# Altium PCB PCB1.PcbDoc
Units mil, origin at the board's own origin, x right, y up, seen from the top; angles counter-clockwise.
Board outline 6369.4 x 4949.4 mil, 2 copper layers (Top Layer, Bottom Layer); 109 components, 62 nets, 359 pads, 58 vias.
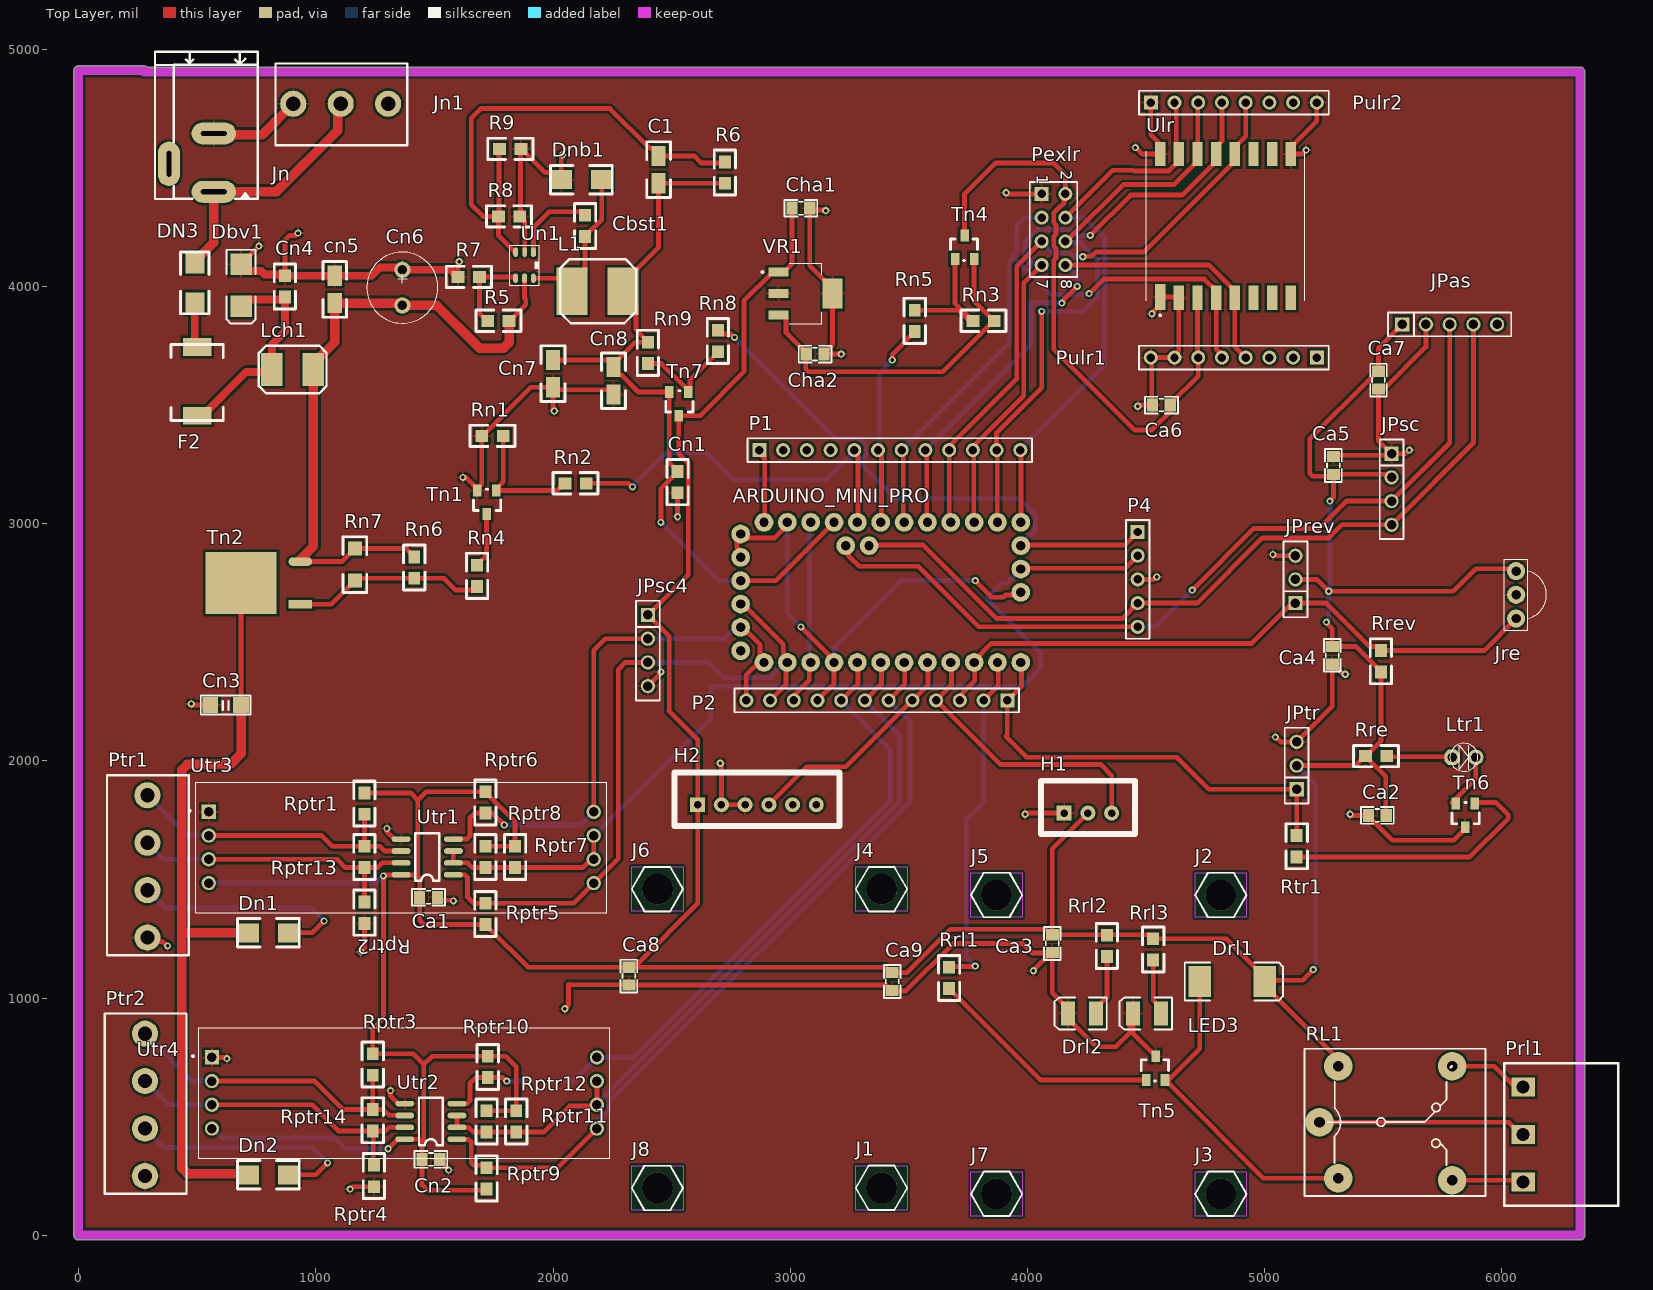
[diagram p0: Top Layer view]
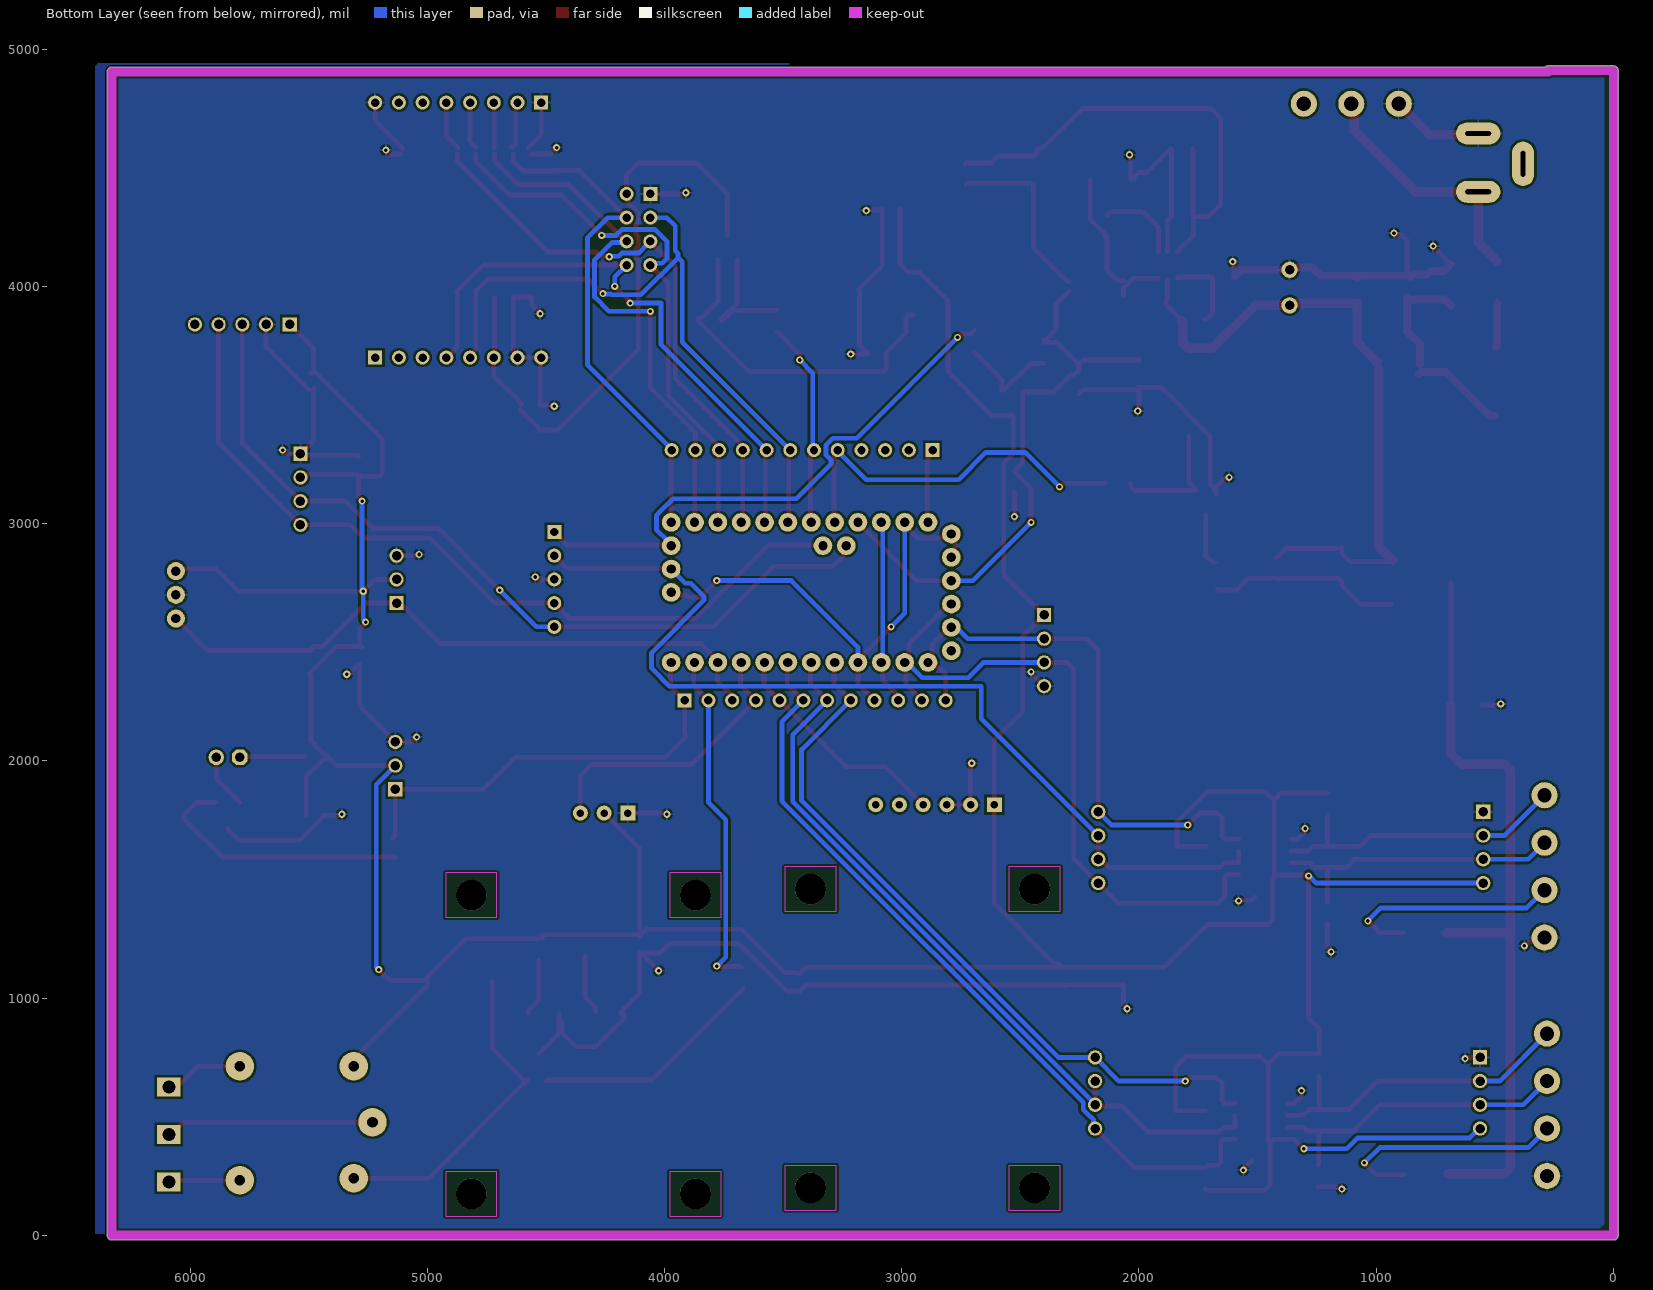
[diagram p1: Bottom Layer view, seen from below]

## Layer stack, top to bottom
Top Solder: solder mask 0.4, Solder Resist, Dk 3.5
Top Layer: signal copper 1.4
Dielectric 1: dielectric 12.6, FR-4, Dk 4.8
Bottom Layer: signal copper 1.4
Bottom Solder: solder mask 0.4, Solder Resist, Dk 3.5

## Board outline
0,-19.7 cw(c0,0) -19.7,0 -19.7,4910 cw(c0,4910) 0,4929.7 275,4929.7 cw(c275,4910) 288.11,4924.7 6330,4924.7 cw(c6330,4905) 6349.7,4905 6349.7,0 cw(c6330,0) 6330,-19.7

## Design rules (kind name [scope] priority, off if disabled: settings)
Clearance Clearance_1 [All] p1: gap=10 ignorepadtopadclearanceinfootprint=FALSE except(0: THPad-Fill THPad-Poly THPad-Region Fill-Hole Poly-Hole Region-Hole)
Clearance Clearance_GND [InNet('GND')] p2: gap=13 ignorepadtopadclearanceinfootprint=FALSE
HoleSize [All] p1: absolutevalues=TRUE maxlimit=200 minlimit=1 maxpercent=80.000 minpercent=20.000
MinimumSolderMaskSliver [All] p1: minsoldermaskwidth=8
PolygonConnect [All] p1: connectstyle=Relief reliefconductorwidth=10 reliefentries=4 polygonreliefangle="90 Angle" airgapwidth=10
RoutingVias [All] p1: holewidth=15 width=30 viastyle="Through Hole" minholewidth=10 minwidth=20 maxholewidth=48 maxwidth=150
SilkToSilkClearance [All] p1: silktosilkclearance=0
SilkToSolderMaskClearance [IsPad] p1: minsilkscreentomaskgap=0 clearancetoexposedcopper=TRUE
SolderMaskExpansion SolderMaskExpansion_1 [All] p1: expansion=4 istentingtop=FALSE
SolderMaskExpansion [IsVia] p2: expansion=4 istentingtop=FALSE
Width [All] p1: maxlimit=40 minlimit=10 preferedwidth=20
26 further rules are at their usual default settings.

## Components (designator, comment, footprint, x,y, rotation, side; value= is the part's Value field where it differs from the comment)
ARDUINO_MINI_PRO "ARDUINO_MINI_PRO" ARDUINO_MINI_PRO 2948.5,2513.43 r90 top
C1 "100pF" 1206e 2445,4435 r90 top
Ca1 "CAP" "Cap 0805" 1475,1425 r0 top
Ca2 "CAP" "Cap 0805" 5475,1770 r180 top
Ca3 "CAP" "Cap 0805" 4105,1230 r270 top
Ca4 "CAP" "Cap 0805" 5285,2445 r270 top
Ca5 "CAP" "Cap 0805" 5290,3245 r90 top
Ca6 "CAP" "Cap 0805" 4565,3500 r180 top
Ca7 "CAP" "Cap 0805" 5480,3605 r270 top
Ca8 "CAP" "Cap 0805" 2320.13,1092.77 r270 top
Ca9 "CAP" "Cap 0805" 3430,1070 r270 top
Cbst1 "Cap" 0805c 2135,4300 r270 top value=100pF
Cha1 "0.47uF" "Cap 0805" 3045,4330 r0 top
Cha2 "0.33uF" "Cap 0805" 3105,3715 r0 top
Cn1 "104" 0805c 2525,3130 r90 top
Cn2 "CAP" "Cap 0805" 1485,320 r0 top
Cn3 "CAP" "Cap 1206" 620,2235 r180 top
Cn4 "104" 0805c 870,3955 r90 top value=100pF
cn5 "CAP" 1206e 1080,3930 r90 top
Cn6 "CAPACITOR" cc15r15 1365,3920 r90 top
Cn7 "CAP" 1206e 2000,3690 r270 top
Cn8 "CAP" 1206e 2255,3660 r270 top
Dbv1 "DIODE" smb 685,4005 r270 top
Dn1 "Diode" Sma 715,1275 r0 top
Dn2 "Diode" Sma 715,255 r0 top
DN3 "DIODE" sma 490,4100 r270 top
Dnb1 "Diode" Sma 2035,4450 r0 top
Drl1 "Diode" SMC 4863.19,1070 r0 top
Drl2 "LED3" 3.5X2.8X1.9 4230,935 r180 top
F2 "FUSE1" FuseSMD050 500,3745 r270 top
H1 "Header 3P 2.54 Duc Thang" XH2.54M-3 4155,1780 r0 top
H2 "Header 6P 2.54 Duc Thang" XH2.54M-6 2610,1815 r0 top
J1 "SO-3015-03-03-02-N" SAMTEC_SO-3015-03-03-02-N#1 3385,200 r0 top
J2 "SO-3015-03-03-02-N" SAMTEC_SO-3015-03-03-02-N#1 4815,1434.37 r0 top locked
J3 "SO-3015-03-03-02-N" SAMTEC_SO-3015-03-03-02-N#2 4815,174.53 r0 top locked
J4 "SO-3015-03-03-02-N" SAMTEC_SO-3015-03-03-02-N#1 3385,1459.37 r0 top
J5 "SO-3015-03-03-02-N" SAMTEC_SO-3015-03-03-02-N#1 3870.12,1434.37 r0 top locked
J6 "SO-3015-03-03-02-N" SAMTEC_SO-3015-03-03-02-N#1 2440.12,1459.37 r0 top
J7 "SO-3015-03-03-02-N" SAMTEC_SO-3015-03-03-02-N#1 3870.12,174.53 r0 top locked
J8 "SO-3015-03-03-02-N" SAMTEC_SO-3015-03-03-02-N#3 2440.12,199.53 r0 top
Jn "DC -JACK" CON3_129_PJ-002A_TH_RA 570,4399 r270 top
Jn1 "CON3" giacdung3 1105,4770 r0 top
JPas "JP 1x5 2.54" "JP 1x5 CT" 5580,3840 r0 top
JPrev "JP 1x3 2.54" "JP 1x3 CT" 5130,2665 r90 top
JPsc "JP 1x4 2.54" "JP 1x4 CT" 5535,3295 r270 top
JPsc4 "JP 1x4 2.54" "JP 1x4 CT" 2400,2615 r270 top
JPtr "JP 1x3 2.54" "JP 1x3 CT" 5135,1880 r90 top
Jre "TSOP1838" TSOP1838 6060,2700 r90 top
L1 "Inductor" IND_SPR06xe 2080,3980 r0 top value=10mH
Lch1 "INDUCTOR" IND_SPR05x 815,3650 r0 top
LED3 "LED3" 3.5X2.8X1.9 4505,935 r180 top
Ltr1 "LED 3mm" LED-3MM-RED 5790,2015 r0 top
P1 "Header 12" HDR1X12 2870,3310 r0 top
P2 "Header 12" HDR1X12 3915,2255 r180 top
P4 "Header 5" HDR1X5 4465,2965 r270 top
Pexlr "nRF24L01" HDR2X4 4060,4390 r270 top
Prl1 "CON 3 EDG5.08" "CON 3 3EDG5.08" 6090,625 r270 top
Ptr1 "Header 4" giacdung4 290,1455 r90 top
Ptr2 "Header 4" giacdung4 280,450 r90 top
Pulr1 "Header 8" HDR1X8 5220,3700 r180 top
Pulr2 "Header 8" HDR1X8 4520,4775 r0 top
R5 "Res1" 0805c 1815,3855 r180 top value=1K
R6 "Res1" 0805c 2725,4435 r90 top value=1K
R7 "Res1" 0805c 1600,4040 r0 top value=1K
R8 "Res1" 0805c 1860,4295 r180 top value=1K
R9 "Res1" 0805c 1865,4580 r180 top value=1K
RL1 "Relay" "Relay 5 Chan SRD" 5231.26,476.22 r0 top
Rn1 "1k" 0805c 1790,3370 r180 top
Rn2 "10k" 0805c 2140,3170 r180 top
Rn3 "1k" 0805c 3770,3855 r0 top
Rn4 "10k" 0805c 1680,2825 r270 top
Rn5 "10k" 0805c 3525,3810 r90 top
Rn6 "10k" 0805c 1415,2860 r270 top
Rn7 "z10V" 1206 1165,2895 r270 top
Rn8 "10k" 0805c 2695,3815 r270 top
Rn9 "1k" 0805c 2400,3675 r90 top
Rptr1 "Res1" 0805c 1205,1865 r270 top value=20K
Rptr2 "Res1" 0805c 1205,1315 r90 top value=20K
Rptr3 "Res1" 0805c 1240,765 r270 top value=20K
Rptr4 "Res1" 0805c 1245,205 r90 top value=20K
Rptr5 "Res1" 0805c 1715,1310 r90 top value=10K
Rptr6 "Res1" 0805c 1715,1870 r270 top value=10K
Rptr7 "Res1" 0805c 1840,1640 r270 top value=10K
Rptr8 "Res1" 0805c 1715,1640 r270 top value=10K
Rptr9 "Res1" 0805c 1720,195 r90 top value=10K
Rptr10 "Res1" 0805c 1725,755 r270 top value=10K
Rptr11 "Res1" 0805c 1845,525 r270 top value=10K
Rptr12 "Res1" 0805c 1720,525 r270 top value=10K
Rptr13 "Res1" 0805c 1205,1550 r90 top value=120
Rptr14 "Res1" 0805c 1240,440 r90 top value=120
Rre "Res1" 0805c 5515,2020 r180 top value=1K
Rrev "Res1" 0805c 5490,2465 r270 top value=1K
Rrl1 "Res1" 0805c 3670,1130 r270 top value=1K
Rrl2 "Res1" 0805c 4335,1175 r90 top value=1K
Rrl3 "Res1" 0805c 4530,1160 r90 top value=1K
Rtr1 "10k" 0805c 5135,1595 r90 top
Tn1 "c1815" sot23-3 1760,3140 r180 top
Tn2 "CON3" dpak 935,2660 r90 top
Tn4 "ao3401" sot23-3 3695,4115 r0 top
Tn5 "ao3401" sot23-3 4500,655 r0 top
Tn6 "ao3401" sot23-3 5885,1820 r180 top
Tn7 "ao3401" sot23-3 2570,3555 r180 top
Ulr "RA-02_LORA" MODULE_RA-02_LORA 4835,4255 r90 top
Un1 "AOZ1282CI" Sot23-6 1885,4085 r270 top
Utr1 "MAX485" so-8 1580,1520 r180 top
Utr2 "MAX485" so-8 1595,405 r180 top
Utr3 "MAX485_MODULE_5V_LOGIC_TLL_TO_RS-485_CONVERTER" MODULE_MAX485_MODULE_5V_LOGIC_TLL_TO_RS-485_CONVERTER 1360,1635 r0 top
Utr4 "MAX485_MODULE_5V_LOGIC_TLL_TO_RS-485_CONVERTER" MODULE_MAX485_MODULE_5V_LOGIC_TLL_TO_RS-485_CONVERTER 1373.19,600 r0 top
VR1 "LM3940IMP-3.3/NOPB" VREG_LM3940IMP-3.3/NOPB 3064.17,3970 r0 top

## Footprints (in the part's own frame and the unit in brackets; to place one, negate y for a bottom-side part, rotate by r counter-clockwise, add the part's x,y. Pads: shape width x height; smd on the part's side, far side on the other; paste and mask are expansions set on the pad)
3.5X2.8X1.9 [mm] "SM LED; 2 C-Bend Leads; Body 3.5 x 2.8 x 1.9 mm, inc leads (LxWxH typ)"
  rect 1.5x2.6 smd: 1(-1.5,0) 2(1.5,0)
  silkscreen extent -2.65,-1.7 2.95,1.7
0805c [mil]
  rect 54x50 smd: 1(0,0) 2(90,0)
  silkscreen extent -50,-45 140,45
1206 [mil]
  rect 60x60 smd: 1(0,0) 2(135,0)
  silkscreen extent -50,-50 185,50
1206e [mil]
  rect 85x60 smd: 1(0,0) 2(115,0)
  silkscreen extent -60,-50 175,50
ARDUINO_MINI_PRO [mm]
  round 2 hole 1: 2(-2.5,-8.5) 3(-2.5,-11) 4(-2.5,-13.5) 5(-2.5,-16) 6(-2.5,-18.5) 7(-2.5,-21) 8(-2.5,-23.5) 9(-2.5,-26) 10(12.5,-26) 11(12.5,-23.5) 12(12.5,-21) 13(12.5,-18.5) A0(12.5,-16) A1(12.5,-13.5) A2(12.5,-11) A3(12.5,-8.5) A4(10,-9.75) A5(10,-7.25) A6(7.5,-26) A7(10,-26) DTR(-1.25,4) GND(-2.5,-6) GND(5,-26) GND(8.75,4) GND(11.25,4) GND(12.5,-1) RAW(12.5,1.5) RST(-2.5,-3.5) RST(12.5,-3.5) RX(-2.5,-1) RX(3.75,4) TX(-2.5,1.5) TX(1.25,4) VCC(6.25,4) VCC(12.5,-6)
"Cap 0805" [mm] "Compoment SMD 80x50mil"
  rect 1.2x1.4 smd: 1(-0.946,-0.003) 2(0.954,-0.003)
  silkscreen extent -1.75,-0.89 1.75,0.89, body extent -0.97,-0.61 1.03,0.64, height 1.23
"Cap 1206" [mm]
  rect 1.7x1.7 smd: 1(-1.65,0) 2(1.65,0)
  silkscreen extent -2.67,-1.02 2.67,1.02, body extent -1.6,-0.8 1.6,0.8, height 1.02
cc15r15 [mil]
  round 69 hole 40: 1(0,0) 2(150,0)
  silkscreen extent -75,-150 225,150
CON3_129_PJ-002A_TH_RA [mm] "DC JACK"
  oval 2.35x4.75 hole 0.5 slot 2.75 at 90 deg: 1(0,0) 2(-6.248,0)
  oval 4.75x2.35 hole 2.75 slot 0.5 at 90 deg: 3(-2.997,-4.801)
  silkscreen extent -14.98,-6.3 0.81,4.7, body extent -13.92,-4.93 0.48,4.47, height 11.01
"CON 3 3EDG5.08" [mm]
  rect 2x2.5 hole 1.4: 1(0,0) 2(5.08,0) 3(10.173,0)
  silkscreen extent -2.54,-2.03 12.71,10.16, body extent -2.5,-1.75 12.67,10.25, height 3.15
dpak [mil]
  rect 36x100 smd: 1(0,0)
  rect 260x300 smd: 2(90,250)
  oval 36x100 smd: 3(180,0)
FuseSMD050 [mil]
  rect 75x120 smd: 1(0,0) 2(290,0)
  silkscreen extent -10,-110 310,110
giacdung3 [mil]
  round 110 hole 60: 1(-200,0) 2(0,0) 3(200,0)
  silkscreen extent -275,-175 280,170
giacdung4 [mil]
  round 110 hole 60: 1(-200,0) 2(0,0) 3(200,0) 4(400,0)
  silkscreen extent -275,-175 485,170
HDR1X5 [mm] "Connector; Header; 5 Position"
  rect 1.5x1.5 hole 0.9: 1(0,0)
  round 1.5 hole 0.9: 2(2.54,0) 3(5.08,0) 4(7.62,0) 5(10.16,0)
  silkscreen extent -1.27,-1.27 11.43,1.27
HDR1X8 [mm] "Connector; Header; 8 Position"
  rect 1.5x1.5 hole 0.9: 1(0,0)
  round 1.5 hole 0.9: 2(2.54,0) 3(5.08,0) 4(7.62,0) 5(10.16,0) 6(12.7,0) 7(15.24,0) 8(17.78,0)
  silkscreen extent -1.27,-1.27 19.05,1.27
HDR1X12 [mm] "Connector; Header; 12 Position"
  rect 1.5x1.5 hole 0.9: 1(0,0)
  round 1.5 hole 0.9: 2(2.54,0) 3(5.08,0) 4(7.62,0) 5(10.16,0) 6(12.7,0) 7(15.24,0) 8(17.78,0) 9(20.32,0) 10(22.86,0) 11(25.4,0) 12(27.94,0)
  silkscreen extent -1.27,-1.27 29.21,1.27
HDR2X4 [mm] "Connector; Header; 4x2 Position"
  rect 1.5x1.5 hole 0.9: 1(0,0)
  round 1.5 hole 0.9: 2(0,2.54) 3(2.54,0) 4(2.54,2.54) 5(5.08,0) 6(5.08,2.54) 7(7.62,0) 8(7.62,2.54)
  silkscreen extent -1.27,-1.27 8.89,3.81
IND_SPR05x [mil]
  rect 90x140 smd: 1(0,0) 2(175,0)
  silkscreen extent -55,-100 230,100
IND_SPR06xe [mil]
  rect 130x200 smd: 1(0,0) 2(215,0)
  silkscreen extent -50,-135 270,135
"JP 1x3 CT" [mm]
  rect 1.52x1.52 hole 1.02: 1(0,0)
  round 1.52 hole 1.02: 2(2.54,0) 3(5.08,0)
  silkscreen extent -1.52,-1.27 6.6,1.27, body extent -1.52,-1.25 6.6,1.25, height 8.51
"JP 1x4 CT" [mm]
  rect 1.52x1.52 hole 1.02: 1(0,0)
  round 1.52 hole 1.02: 2(2.54,0) 3(5.08,0) 4(7.62,0)
  silkscreen extent -1.52,-1.27 9.14,1.27, body extent -1.52,-1.25 9.14,1.25, height 8.51
"JP 1x5 CT" [mm]
  rect 1.52x1.52 hole 1.02: 1(0,0)
  round 1.52 hole 1.02: 2(2.54,0) 3(5.08,0) 4(7.62,0) 5(10.16,0)
  silkscreen extent -1.52,-1.27 11.68,1.27, body extent -1.52,-1.25 11.68,1.25, height 8.51
LED-3MM-RED [mil]
  oct 65x65 hole 40: 1(0,0)
  round 65 hole 40: 2(100,0)
  silkscreen extent -9,-59 109,59, body extent -27,-77 117,80, height 181
MODULE_MAX485_MODULE_5V_LOGIC_TLL_TO_RS-485_CONVERTER [mm]
  rect 1.53x1.53 hole 1.02: 1(-20.6,3.81)
  round 1.53 hole 1.02: 2(-20.6,1.27) 3(-20.6,-1.27) 4(-20.6,-3.81) 5(20.62,-3.81) 6(20.62,-1.27) 7(20.62,1.27) 8(20.62,3.81)
  silkscreen extent -22.73,-7 22,7, body extent -22,-7.01 22,6.98, height 13.54
MODULE_RA-02_LORA [mm]
  rect 2.8x1.1 smd: 1(-7.6,7)
  rect 2.6x1.1 smd: 2(-7.7,5) 3(-7.7,3) 4(-7.7,1) 5(-7.7,-1) 6(-7.7,-3) 7(-7.7,-5) 8(-7.7,-7) 9(7.7,-7) 10(7.7,-5) 11(7.7,-3) 12(7.7,-1) 13(7.7,1) 14(7.7,3) 15(7.7,5) 16(7.7,7)
  silkscreen extent -9.68,-8.5 8,8.5
"Relay 5 Chan SRD" [mil] "Relay SPDT, 5 pin, 10A,W 650mil, L 800mil, H 800mil"
  round 120 hole 45: 1(0,0) 2(559.06,236.22) 3(559.06,-243.78) 4(78.74,-236.22) 5(78.74,236.22)
  silkscreen extent -63,-311 700,310, body extent -55,-306 697,304, height 602
SAMTEC_SO-3015-03-03-02-N#1 [mm]
  round 3.3 hole 3.3 unplated mask+0: ""(0,0)
  Keep-Out Layer region: 2.75,-2.38 -2.75,-2.38 -2.75,2.38 2.75,2.38
  Keep-Out Layer region: 2.75,-2.38 -2.75,-2.38 -2.75,2.38 2.75,2.38
  silkscreen extent -2.75,-2.38 2.75,2.38
SAMTEC_SO-3015-03-03-02-N#2 [mm]
  round 3.3 hole 3.3 unplated: ""(0,0)
  Keep-Out Layer region: 2.75,-2.38 -2.75,-2.38 -2.75,2.38 2.75,2.38
  Keep-Out Layer region: 2.75,-2.38 -2.75,-2.38 -2.75,2.38 2.75,2.38
  silkscreen extent -2.75,-2.38 2.75,2.38
SAMTEC_SO-3015-03-03-02-N#3 [mm]
  round 3.3 hole 3.3 unplated mask+0: 3(0,0)
  Keep-Out Layer region: 2.75,-2.38 -2.75,-2.38 -2.75,2.38 2.75,2.38
  Keep-Out Layer region: 2.75,-2.38 -2.75,-2.38 -2.75,2.38 2.75,2.38
  silkscreen extent -2.75,-2.38 2.75,2.38
Sma [mil]
  rect 90x80 smd: 1(0,0) 2(170,0)
  silkscreen extent -45,-60 215,60
sma [mil]
  rect 90x80 smd: 1(0,0) 2(170,0)
  silkscreen extent -45,-60 215,60
smb [mm] "DO-214-AA/SMB; 2 C-Bend Leads; Body 5.3 x 3.6 mm, inc. leads (LxW)"
  rect 2.3x2.3 smd: 1(-2.25,0) 2(2.25,0)
  silkscreen extent -3.8,-1.55 4.1,1.55
SMC [mm] "DO-214-AB/SMC; 2 C-Bend Leads; Body 7.9 x 5.9 mm, inc. leads (LxW)"
  rect 2.4x3.3 smd: 1(-3.475,0) 2(3.475,0)
  silkscreen extent -5.07,-2.05 5.43,2.05
so-8 [mil]
  oval 80x24 smd: 1(0,0) 2(0,-50) 3(0,-100) 4(0,-150) 5(220,-150) 6(220,-100) 7(220,-50) 8(220,0)
  silkscreen extent 60,-175 160,25
sot23-3 [mil]
  rect 36x50 smd: 1(0,0) 2(80,0) 3(40,100)
  silkscreen extent -20,-5 95,85
Sot23-6 [mil]
  oct 40x20 smd: 1(-59.41,32.4)
  oval 40x20 smd: 2(-59.41,-4.6) 3(-59.41,-42.6) 4(50.59,-42.6) 5(50,-5) 6(50.59,32.4)
  silkscreen extent -89,-68 81,57, body extent -64,-64 54,54, height 51
TSOP1838 [mil]
  round 76 hole 39.37: 1(-100,0) 2(0,0) 3(100,0)
  silkscreen extent -150,-128 150,50, body extent -118,-159 118,61, height 404
VREG_LM3940IMP-3.3/NOPB [mm]
  rect 2.15x0.95 smd: 1(-2.9,2.3) 2(-2.9,0) 3(-2.9,-2.3)
  rect 2.15x3.25 smd: 4(2.9,0)
  silkscreen extent -4.7,-3.25 1.75,3.25, body extent -3.5,-3.25 3.5,3.25, height 1.8
XH2.54M-3 [mm]
  rect 1.6x1.6 hole 0.8: 1(0,0)
  round 1.6 hole 0.8: 2(2.54,0) 3(5.08,0)
  silkscreen extent -2.48,-2.26 7.56,3.46, body extent -2.48,-2.26 7.56,3.48, height 6.91
XH2.54M-6 [mm]
  rect 1.6x1.6 hole 0.8: 1(0,0)
  round 1.6 hole 0.8: 2(2.54,0) 3(5.08,0) 4(7.62,0) 5(10.16,0) 6(12.7,0)
  silkscreen extent -2.48,-2.26 15.18,3.46, body extent -2.48,-2.26 15.18,3.48, height 6.91

## Part data
C1: library part CAP, "Capacitor"
Ca1 Ca2 Ca3 Ca4 Ca5 Ca6 Ca7 Ca8 Ca9 Cha1 Cha2 Cn2: library part "Cap 0805", "Capacitor SMD 0805"
Cbst1 cn5 Cn6 Cn7 Cn8: "Capacitor"
  Cbst1: LatestRevisionDate=17-Jul-2002, LatestRevisionNote="Re-released for DXP Platform.", PackageReference=RAD-0.3, Published=8-Jun-2000, Publisher="Altium Limited"
Cn1 Cn4: library part Cap, "Capacitor", LatestRevisionDate=17-Jul-2002, LatestRevisionNote="Re-released for DXP Platform.", PackageReference=RAD-0.3, Published=8-Jun-2000, Publisher="Altium Limited"
Cn3: library part "Cap 1206", "Capacitor SMD 1206"
Dbv1 DN3: "Diode"
Dn1 Dn2 Dnb1 Drl1: "Default Diode", Code_JEDEC=DO-214-AB, LatestRevisionDate=17-Jul-2002, LatestRevisionNote="Re-released for DXP Platform.", PackageReference=SMC, PackageVersion=Sep-1996, Published=8-Jun-2000, Publisher="Altium Limited"
  Drl1: PackageDescription="DO-214-AB/SMC; 2 C-Bend Leads; Body 7.9 x 5.9 mm, inc. leads (LxW)"
Drl2 LED3: "Typical BLUE SiC LED", DatasheetVersion=16-Apr-2002, LatestRevisionDate=17-Dec-2003, LatestRevisionNote="PCB Footprint replaced.", PackageDescription="SM LED; 2 C-Bend Leads; Body 3.5 x 2.8 x 1.9 mm, inc leads (LxWxH typ)", PackageReference=3.5X2.8X1.9, PackageVersion=16-Apr-2002, Published=8-Jun-2000, Publisher="Altium Limited"
F2: "Fuse"
H1 H2 Prl1: "Cắm", Chung_Loai=Cắm, Don_Vi=Con
  H1: Ma_Hang=MH001292, Ten_Linh_Kien="Header 3P XH2.54-3P Đực Thẳng"
  H2: Ma_Hang=MH001972, Ten_Linh_Kien="Header 6P XH2.54-6P Đực Thẳng"
  Prl1: Ma_Hang=MH000760, Ten_Linh_Kien="CON 3 2EDG5.08-3P 5.08MM ( Xanh Cong)"
J1 J2 J3 J4 J5 J6 J7 J8: "Precision Board Stacking Standoff", Package=None, Check_prices=https://www.snapeda.com/parts/SO-3015-03-03-02-N/Samtec/view-part/?ref=eda, MF=Samtec, MP=SO-3015-03-03-02-N, SnapEDA_Link=https://www.snapeda.com/parts/SO-3015-03-03-02-N/Samtec/view-part/?ref=snap
Jn: library part CON-PLG_3X1-228-DC_JACK, "3 Pins, 1 Row 228mil Pitch, right angle Connector, male", Alternate Part Number-1=NA, Case/Package=TH-CON, Manufacturer=JST, Manufacturer Part Number=PJ-002A, Supplier Part Number-1=NA, Supplier-1="SP ROAD"
Jn1 Tn2: "Connector"
JPas: library part "JP 1x5 2.54 Cai Thang", "Cắm", Chung_Loai=Cắm, Don_Vi=Con, Ma_Hang=MH004006, Ten_Linh_Kien="Jump Đơn Cái 2.54MM 1x20P Thẳng"
JPrev JPtr: library part "JP 1x3 2.54 Cai Thang", "Cắm", Chung_Loai=Cắm, Don_Vi=Con, Ma_Hang=MH004006, Ten_Linh_Kien="Jump Đơn Cái 2.54MM 1x20P Thẳng"
JPsc JPsc4: library part "JP 1x4 2.54 Cai Thang", "Cắm", Chung_Loai=Cắm, Don_Vi=Con, Ma_Hang=MH004006, Ten_Linh_Kien="Jump Đơn Cái 2.54MM 1x20P Thẳng"
Jre: "IR Remote Receiver 38KHz 35m 3-Pin", Package=None, Check_prices=https://www.snapeda.com/parts/TSOP1838/Vishay/view-part/?ref=eda, MF=Vishay, MP=TSOP1838, SnapEDA_Link=https://www.snapeda.com/parts/TSOP1838/Vishay/view-part/?ref=snap
Ltr1: library part "LED 3mm Do", "Cắm", Chung_Loai=Cắm, Don_Vi=Con, Ma_Hang=MH003892, Ten_Linh_Kien="Led 3MM Phủ Đỏ (10c)"
P1 P2: "Header, 12-Pin", LatestRevisionDate=17-Jul-2002, LatestRevisionNote="Re-released for DXP Platform.", Publisher="Altium Limited"
P4: "Header, 5-Pin", LatestRevisionDate=17-Jul-2002, LatestRevisionNote="Re-released for DXP Platform.", Publisher="Altium Limited"
Pexlr: library part "Header 4X2", "Header, 4-Pin, Dual row", LatestRevisionDate=17-Jul-2002, LatestRevisionNote="Re-released for DXP Platform.", Publisher="Altium Limited"
Ptr1 Ptr2: "Header, 4-Pin", LatestRevisionDate=17-Jul-2002, LatestRevisionNote="Re-released for DXP Platform.", Publisher="Altium Limited"
Pulr1 Pulr2: "Header, 8-Pin", LatestRevisionDate=17-Jul-2002, LatestRevisionNote="Re-released for DXP Platform.", Publisher="Altium Limited"
R5 R6 R7 R8 R9 Rptr1 Rptr2 Rptr3 Rptr4 Rptr5 Rptr6 Rptr7 Rptr8 Rptr9 Rptr10 Rptr11 Rptr12 Rptr13 Rptr14 Rre Rrev Rrl1 Rrl2 Rrl3: "Resistor", LatestRevisionDate=17-Jul-2002, LatestRevisionNote="Re-released for DXP Platform.", PackageReference=AXIAL-0.3, Published=8-Jun-2000, Publisher="Altium Limited"
RL1: library part "Relay 5 Chan SRD", "Relay 5 Chan", Ma_Hang=MH009374, Ten="Relay 5V10A SRD-05VDC-SL-C Chính Hãng"
Rn1 Rn2 Rn3 Rn4 Rn5 Rn6 Rn7 Rn8 Rn9 Rtr1: library part RES2
Tn1 Tn4 Tn5 Tn6 Tn7: library part CON3, "Connector"
Ulr: "Ra-02 LoRa RF M5Stack Platform Evaluation Expansion Board", Package=None, Availability=Unavailable, MP=RA-02_LORA, Price=None
Un1: "AOZ1282"
Utr1 Utr2: library part DS36F95, "DIFFERENTIAL BUS TRANSCEIVERS"
Utr3 Utr4: "5V MAX485 TTL To RS485 Converter Module Board for Arduino", Package=Package, Availability="Not in stock", Check_prices=https://www.snapeda.com/parts/MAX485%20Module%205V%20logic%20TLL%20to%20RS-485%20converter/e-Gizmo+Mechatronix+Central/view-part/?ref=eda, MF="e-Gizmo Mechatronix Central", MP="MAX485 Module 5V logic TLL to RS-485 converter", Price=None, SnapEDA_Link=https://www.snapeda.com/parts/MAX485%20Module%205V%20logic%20TLL%20to%20RS-485%20converter/e-Gizmo+Mechatronix+Central/view-part/?ref=snap
VR1: "1-A, low-dropout voltage regulator for 5-V to 3.3-V conversion 4-SOT-223 -40 to 125", Package="SOT-223-4 Texas Instruments", Check_prices=https://www.snapeda.com/parts/LM3940IMP-3.3/Texas+Instruments/view-part/?ref=eda, MF="Texas Instruments", MP=LM3940IMP-3.3, SnapEDA_Link=https://www.snapeda.com/parts/LM3940IMP-3.3/Texas+Instruments/view-part/?ref=snap
L1: Code_IEC=1005, Code_JEITA=0402, LatestRevisionDate=29-May-2009, LatestRevisionNote="IPC-7351 Footprint Added.", PackageDescription="Chip Inductor", PackageReference=0402-A, Published=8-Jun-2000, Publisher="Altium Limited"

## Via types
v1: diameter 30, hole 15, Top Layer to Bottom Layer, 58 vias

## Nets (pads, with @x,y where several pads share a name; then routed paths per layer and width w, separated by ;. In a path a pad name is that pad's centre, name@x,y a point inside that pad or via, vN(x,y) a via of type N, cw(c..) or ccw(c..) an arc to the next point about the centre after c; other vN are vias at no path point)
+24: cn5.1 Cn6.1 Lch1.2 R5.1 Rn6.1 Rn7.1 Tn2.3 Un1.5 | length 2763.7
  Top Layer w20: Tn2.3 1110,2840 1145,2875 Rn7.1@1145,2900 ; Rn7.1 1382,2895 1420,2857 Rn6.1@1420,2855 ; R5.1 1817,3855 1885,3923 1885,3945 1880,3950 Un1.5@1880,4030
  Top Layer w40: Tn2.3@930,2845 990,2905 Lch1.2 ; Lch1.2@995,3680 1080,3765 cn5.1 1347.15,3930 1362.15,3915 Cn6.1@1365,3915 ; Cn6.1 1510,3920 1690,3740 1791.57,3740 1815,3763.43 1815,3850 R5.1@1820,3855
A: ARDUINO_MINI_PRO.6 H1.3 P2.4 | length 1198.9
  Top Layer w20: P2.4 3885,1985 4308.28,1985 4355,1938.28 4355,1795 H1.3@4350,1790 ; P2.4@3625,2265 3679.72,2319.72 ARDUINO_MINI_PRO.6@3679.72,2419.72
COM: Prl1.2 RL1.1 | length 889.1
  Top Layer w20: RL1.1 6028.94,476.22 6090.16,415 Prl1.2@6095,415
DIO0: ARDUINO_MINI_PRO.A0 P1.8 Pexlr.8 Pulr1.4 Ulr.5 | length 2509.4
  Top Layer w20: ARDUINO_MINI_PRO.A0@3570,3015 3575.65,3020.65 3575.65,3304.35 P1.8 ; v1(4145.47,3930) 4145.47,3935.47 v1(4210,4000) ; Pexlr.8 4765.75,4090 4874.37,3981.38 Ulr.5 4874.37,3745.63 Pulr1.4 Pulr1.4@4925,3695 ; Ulr.5@4875,3975 Ulr.5@4875,3980.75
  Bottom Layer w20: P1.8 4015,3755 4015,3925 ; 4015,3930 v1(4145.47,3930) ; Pexlr.8 4210,4040 v1(4210,4000)
GND: Ca1.2 Ca2.2 Ca3.2 Ca4.2 Ca5.2 Ca6.2 Ca7.2 Ca8.2 Ca9.2 Cha1.2 Cha2.2 Cn1.1 Cn2.2 Cn3.2 Cn4.2 cn5.2 Cn6.2 Cn7.2 Cn8.2 Dbv1.1 Dnb1.1 Drl2.2 H1.1 H2.2 H2.3 Jn1.1 Jn.2 JPas.2 JPrev.3 JPsc4.4 JPsc.1 JPtr.3 Jre.2 LED3.2 P4.3 Pexlr.1 Ptr1.1 Ptr2.1 Pulr1.7 Pulr1.8 Pulr2.1 Pulr2.8 R7.1 R8.1 R9.1 Rn1.2 Rptr2.1 Rptr4.1 Tn1.2 Tn5.3 Tn6.3 Ulr.1 Ulr.2 Ulr.9 Ulr.16 Un1.2 Utr1.5 Utr2.5 Utr3.1 Utr4.1 VR1.2 VR1.4 | length 12965.1
  Top Layer w20: Ptr2.1 Ptr2.1@304.35,250 ; Ptr1.1 307.22,1237.78 354.51,1237.78 372.29,1220 v1(375,1220) ; v1(475,2240) 477.71,2240 482.71,2235 Cn3.2 ; Utr3.1 Utr3.1@569.09,1805.12 ; Utr4.1 617.29,750 622.29,745 v1(625,745) ; Jn.2 617.24,4645 622.29,4645 Jn.2@622.29,4635.41 ; Dbv1.1 760,4168.58 v1(760,4170) ; Cn4.2 870,4195 890,4215 915,4215 v1(925,4225) ; v1(1145,195) 1155,205 Rptr4.1 ; v1(1190,1195) 1205,1210 Rptr2.1 ; v1(1300,1715) 1300,1702 1332,1670 Utr1.5 ; v1(1315,610) 1315,587 1347,555 Utr2.5 ; Ca1.2 1525.53,1411.91 1578.09,1411.91 v1(1580,1410) ; Cn2.2 1522.57,315.93 1558.09,280.42 1558.09,276.91 v1(1560,275) ; R7.1 1600,4097.29 1605,4102.29 v1(1605,4105) ; v1(1620,3195) 1632,3195 Tn1.2@1680,3147 ; Tn1.2@1675,3125 1675,3142 Tn1.2@1680,3147 ; Tn1.2 Tn1.2@1680,3147 ; Rn1.2 1700,3167 Tn1.2@1680,3147 ; Rn1.2@1705,3373 1907,3575 Cn7.2 2000,3482.71 2005,3477.71 v1(2005,3475) ; Un1.2 1880.4,4276.6 1862,4295 R8.1 1862.5,4297.5 1862.5,4577.5 R9.1 1867,4580 1967,4480 2000,4480 2020,4460 Dnb1.1@2020,4450 ; Cn7.2@2010,3565 2235,3565 Cn8.2 ; Dnb1.1 2035,4547.29 2040,4552.29 v1(2040,4555) ; v1(2050,955) 2064.87,969.87 2064.87,1057.43 2065.98,1056.31 2303.69,1056.31 Ca8.2@2310,1050 ; Ca8.2 3403.16,1055.2 3428.35,1030 3487.43,1030 3687.43,1230 3980,1230 4020,1190 Ca3.2@4098.5,1190 ; JPsc4.4@2406.91,2311.91 2403.09,2311.91 JPsc4.4 2455,2370 v1(2455,2375) ; v1@2525,3020 v1(2525,3030) Cn1.1 ; v1(2705,1990) 2710,1985 H2.2 2800,1815 H2.3@2810,1805 ; Cha2.2 Cha2.2 3214.93,3714.93 v1(3215,3715) ; Cha2.2@3145,3721.23 3178.35,3754.57 VR1.4 ; v1(3150,4320) 3148.09,4321.91 3090.53,4321.91 Cha1.2 3082.57,4087.43 3180,3990 VR1.4@3180,3980 ; v1(3910,4395) 3915,4390 Pexlr.1 ; v1(3990,1775) 3995,1780 H1.1 ; v1(4025,1115) 4025,1116.5 Ca3.2@4098.5,1190 ; Ca3.2 4100.93,1192.43 Ca3.2@4098.5,1190 ; Ca3.2@4105,1185 Ca3.2@4104.87,1185.13 ; Drl2.2 4170.94,913.35 4190.47,893.82 4191.18,893.82 4290,795 4373.28,795 4432.1,853.82 4432.1,893.82 4438.28,900 LED3.2@4440,900 ; Drl2.2@4185,935 4185,942.6 4104.87,1022.73 Ca3.2@4104.87,1185.13 ; LED3.2 4445.94,849.06 Tn5.3@4530,765 ; v1(4455,4585) 4457.71,4585 4484.56,4558.15 Ulr.16 ; P4.3 4532.29,2765 4542.29,2775 v1(4545,2775) ; v1(4465,3495) 4467.71,3495 4472.77,3500.07 Ca6.2 Ca6.2 ; Pulr1.8 4523.71,3696.29 4523.71,3501.29 Ca6.2@4524.87,3500.13 ; Pulr2.1 4520,4640 Ulr.16@4575,4585 ; v1(4525,3885) 4526.91,3886.91 4526.91,3889.83 4559.41,3922.32 Ulr.1 Ulr.2@4639.21,3955.79 ; Pulr1.8@4530,3700 Pulr1.7 ; Pulr1.7@4620,3710 4620,3710.57 4638.15,3728.72 Ulr.2 ; v1(5035,2870) 5037.71,2870 5042.71,2865 JPrev.3 ; v1(5045,2100) 5047.71,2100 5067.71,2080 JPtr.3 ; Ulr.9@5105,4580 5105,4582.09 5220,4697.09 Pulr2.8 ; Ulr.9 5158.15,4558.15 v1(5175,4575) ; JPtr.3@5140,2085 5284.87,2229.87 Ca4.2 5288.8,2407.43 5329.31,2366.91 5338.09,2366.91 v1(5340,2365) ; Ca5.2 5296.35,3288.79 5516.21,3288.79 JPsc.1@5525,3280 ; v1(5360,1775) 5362.71,1775 5367.57,1770.13 Ca2.2 5437.43,1766.2 5466.18,1737.44 5466.18,1736.72 5537.9,1665 5797,1665 5840,1708 Tn6.3@5840,1715 ; Ca7.2 5479.87,3350.13 JPsc.1 5593.66,3295 5608.66,3310 v1(5610,3310) ; Ca7.2@5500,3565 5680,3745 JPas.2 ; Jre.2@6060,2685.86 Jre.2 ; Ca3.2@4098.5,1190 4100,1190 Ca3.2@4104.87,1185.13
  Top Layer w33: Dbv1.1 713.78,4064.81 770.19,4064.81 785,4050 845,4050 Cn4.2@855,4040 ; Cn4.2 1070,4045 cn5.2@1080,4035 ; cn5.2 1235,4045 1270,4080 1340,4080 Cn6.2@1343.11,4076.89 ; Cn6.2 1568,4070 R7.1@1595,4043
  Top Layer w40: Jn.2@625,4640 775,4640 Jn1.1
  Bottom Layer w20: Utr3.1 560,1785 Utr3.1@565,1790
INT: JPas.5
MISO: ARDUINO_MINI_PRO.12 P1.10 Pexlr.7 Pulr2.4 Ulr.13 | length 2546.6
  Top Layer w20: P1.10@3769.43,3320 3777.47,3328.04 3777.47,3332.47 3985,3540 3985,4015 Pexlr.7 ; P1.10 3774.07,3305.93 3774.07,3010.93 ARDUINO_MINI_PRO.12@3780,3005 ; v1(4265,4215) 4435,4385 4652.01,4385 4795.63,4528.62 Ulr.13 ; Ulr.13@4795,4585 4795,4587.05 4820,4612.05 Pulr2.4
  Bottom Layer w20: Pexlr.7@4055,4085 4042.53,4097.47 4009.95,4097.47 3990,4117.43 3990,4190.04 4039.49,4239.53 4180.52,4239.53 4205.04,4215 v1(4265,4215)
MOSI: ARDUINO_MINI_PRO.11 P1.11 Pexlr.6 Pulr2.3 Ulr.14 | length 2451.7
  Top Layer w20: ARDUINO_MINI_PRO.11@3875,3015 3873.29,3016.71 3873.29,3306.71 P1.11 3870,3382.57 4060,3572.57 v1(4060,3895) ; Pexlr.6@4165,4200 4175,4200 4405,4430 4618.27,4430 4716.89,4528.62 Ulr.14 ; Ulr.14@4720,4585 4718.44,4586.56 4718.44,4773.44 Pulr2.3
  Bottom Layer w20: v1(4060,3895) 4234.5,3895 4295,3955.5 4295,4112.57 4222.57,4185 Pexlr.6@4160,4185
NetARDUINO_MINI_PRO_GND: ARDUINO_MINI_PRO.GND P2.9 | length 2187.6
  Top Layer w20: ARDUINO_MINI_PRO.GND@2765,2961.85 2775,2951.85 2775,2900 ARDUINO_MINI_PRO.GND@2800,2875 ; ARDUINO_MINI_PRO.GND@2801.64,2940 2935,2940 ARDUINO_MINI_PRO.GND@2987.87,2992.87 ; ARDUINO_MINI_PRO.GND@2987.87,3005.55 ARDUINO_MINI_PRO.GND@2988.82,3004.61 ; v1(3045,2565) ARDUINO_MINI_PRO.GND@3189.86,2420.14 ; P2.9 3184.72,2324.72 3184.72,2415 ARDUINO_MINI_PRO.GND@3189.86,2420.14 ; ARDUINO_MINI_PRO.GND@3192.08,2424.37 3193.09,2423.36 ARDUINO_MINI_PRO.GND@3189.86,2420.14 ; v1(3780,2760) 3850,2690 3897.71,2690 3906.74,2699.04 3960.89,2699.04 ARDUINO_MINI_PRO.GND@3972.13,2710.28
  Bottom Layer w20: ARDUINO_MINI_PRO.GND@2987.87,3005.55 2987.87,2622.13 v1(3045,2565) ; ARDUINO_MINI_PRO.GND@3184.72,2415 3184.72,2479.72 3465,2760 v1(3780,2760)
NetARDUINO_MINI_PRO_RAW: ARDUINO_MINI_PRO.RAW P1.1 | length 286.9
  Top Layer w20: P1.1@2875,3290 2892.32,3272.68 ARDUINO_MINI_PRO.RAW@2892.32,3010.28
NetARDUINO_MINI_PRO_RST: ARDUINO_MINI_PRO.RST P2.10 | length 765.8
  Top Layer w20: P2.10@3015,2275 3080.28,2340.28 ARDUINO_MINI_PRO.RST@3080.28,2430.51
  Bottom Layer w20: ARDUINO_MINI_PRO.RST@3075,2440 3080.28,2445.28 ARDUINO_MINI_PRO.RST@3080.28,3021.06
NetARDUINO_MINI_PRO_VCC: P1.4 | length 6.2
  Top Layer w20: P1.4 P1.4@3174.35,3305.65
NetC1_2: C1.2 R6.2 R8.2 R9.2 Un1.3 | length 2151.8
  Top Layer w20: R8.2 1705,4295 1655,4345 1655,4710 1695,4750 2240,4750 2407.5,4582.5 2425,4582.5 2430,4577.5 C1.2@2430,4560 ; R9.2 1772.5,4577.5 1772.5,4292.5 1770,4290 1770,4215 Un1.3@1840,4145 ; C1.2 2595,4550 2625,4520 2730,4520 R6.2@2735,4515
NetCbst1_1: Cbst1.1 Un1.1 | length 354.8
  Top Layer w20: Un1.1 1917.4,4247.4 1985,4315 2120,4315 Cbst1.1
NetCn4_1: Cn4.1 Dbv1.2 F2.2 Lch1.1 | length 895.4
  Top Layer w33: F2.2 522.5,3455 707.5,3640 810,3640 Lch1.1@820,3630 ; Dbv1.2 713.58,3945 Cn4.1@860,3945 ; Lch1.1@815,3670 815,3755 870,3810 Cn4.1
NetDn1_2: Dn1.2 Ptr1.2 | length 969.6
  Top Layer w20: Dn1.2 985,1275 v1(1035,1325)
  Bottom Layer w20: Ptr1.2 365,1380 980,1380 v1(1035,1325)
NetDn2_2: Dn2.2 Ptr2.2 | length 1015.8
  Top Layer w20: Dn2.2 1000,255 v1(1050,305)
  Bottom Layer w20: Ptr2.2 360,370 985,370 v1(1050,305)
NetDN3_2: DN3.2 F2.1 | length 187.1
  Top Layer w33: DN3.2 490,3750 F2.1@495,3745
NetDrl1_1: Drl1.1 RL1.4 Tn5.2 | length 1395.8
  Top Layer w20: Tn5.2 4580,648 4588,640 4595,640 4995,240 5295,240 RL1.4@5315,220 ; Tn5.2@4590,650 4726.38,786.38 Drl1.1
NetDrl2_1: Drl2.1 Rrl2.1 | length 248.6
  Top Layer w20: Drl2.1@4290,945 4290,957.6 4335,1002.6 Rrl2.1
NetLED3_1: LED3.1 Rrl3.1 | length 243.6
  Top Layer w20: Rrl3.1 4530,990.71 4575,945.71 LED3.1@4575,935
NetLtr1_1: Ltr1.1 Rre.1 | length 272.1
  Top Layer w20: Rre.1 5517.5,2017.5 5782.5,2017.5 Ltr1.1@5785,2015
NetLtr1_2: Ltr1.2 Tn6.2 | length 231.4
  Top Layer w20: Tn6.2@5790,1825 5890,1925 Ltr1.2
NetPrl1_1: Prl1.1 RL1.2 | length 343.3
  Top Layer w20: RL1.2 5967.56,712.44 Prl1.1@6085,595
NetPrl1_3: Prl1.3 RL1.3 | length 299
  Top Layer w20: RL1.3 6057.56,232.44 Prl1.3@6080,210
NetR5_2: R5.2 R7.2 Un1.4 | length 350.7
  Top Layer w20: R5.2@1725,3860 1718,3860 1690,3888 R7.2 1835,4040 Un1.4@1840,4035
NetRn1_1: Rn1.1 Rn2.2 Tn1.1 | length 530.4
  Top Layer w20: Tn1.1 2018,3140 2035,3157 Rn2.2@2035,3170 ; Tn1.1@1765,3145 1765,3152 1790,3177 Rn1.1
NetRn3_1: Rn3.1 Rn5.2 Tn4.1 | length 528.5
  Top Layer w20: Rn5.2 3710,3900 Rn3.1@3750,3860 ; Tn4.1 3695,3928 3760,3863 Rn3.1@3760,3855
NetRn4_1: Rn4.1 Tn1.3 | length 226.3
  Top Layer w20: Rn4.1@1680,2835 1688,2835 1720,2867 Tn1.3
NetRn4_2: Rn4.2 Rn6.2 Rn7.2 Tn2.1 | length 809.2
  Top Layer w20: Tn2.1 1065,2660 1145,2740 1145,2755 1160,2770 1405,2770 Rn6.2@1410,2765 ; Rn6.2 1540,2770 1590,2720 1665,2720 Rn4.2@1670,2725
NetRn8_2: Rn8.2 Rn9.1 Tn7.1 | length 430.3
  Top Layer w20: Rn9.1 2457,3675 2567,3565 Tn7.1@2570,3565 ; Tn7.1@2575,3560 2578,3563 2578,3606 2695,3723 Rn8.2
NetRrl1_2: Rrl1.2 Tn5.1 | length 992.7
  Top Layer w20: Rrl1.2 3670,1038 3685,1023 3687,1023 4055,655 4495,655 Tn5.1@4500,650
NetRtr1_1: Rtr1.1 Tn6.1 | length 1128.4
  Top Layer w20: Rtr1.1 5865,1595 6026.72,1756.72 6026.72,1773.28 5975,1825 Tn6.1@5895,1825
NSS: ARDUINO_MINI_PRO.10 P1.12 Pexlr.4 Pulr2.2 Ulr.15 | length 2357.1
  Top Layer w20: ARDUINO_MINI_PRO.10@3963.6,3033.29 ARDUINO_MINI_PRO.10@3981.1,3015.79 ; P1.12 3972.5,3307.5 ARDUINO_MINI_PRO.10@3972.5,3022.5 ; Pexlr.4@4165,4305 4167.24,4302.76 4172.76,4302.76 4360,4490 4445,4490 4448.03,4486.97 4596.5,4486.97 4638.15,4528.62 Ulr.15 ; Pulr2.2 4627.47,4767.53 4627.47,4599.33 4636.8,4590 Ulr.15@4645,4590
  Bottom Layer w20: P1.12@3965,3310 4325,3670 4325,4204.5 4239.5,4290 Pexlr.4
OUT: ARDUINO_MINI_PRO.7 JPrev.1 Jre.1 P2.3 Rrev.1 | length 2682.9
  Top Layer w20: P2.3@3720,2255 3722.47,2257.47 3722.47,2282.47 3778.15,2338.15 3778.15,2424.95 3848.2,2495 4945,2495 JPrev.1@5110,2660 ; JPrev.1 5260,2665 5443,2482 5478,2482 Rrev.1@5490,2470 ; Rrev.1 5925,2465 Jre.1@6055,2595
Po: ARDUINO_MINI_PRO.5 H2.4 P2.5 | length 944.1
  Top Layer w20: H2.4@2925,1830 3070,1975 3235,1975 P2.5 ; P2.5@3525,2265 3581.3,2321.3 ARDUINO_MINI_PRO.5@3581.3,2419.72
PowEn1: ARDUINO_MINI_PRO.A2 P1.6 Rn5.1 | length 877.3
  Top Layer w20: P1.6 3370,3299.43 3384.45,3284.98 ARDUINO_MINI_PRO.A2@3384.45,3010.28 ; v1(3430,3690) 3430,3713 3525,3808 Rn5.1
  Bottom Layer w20: P1.6@3375,3300.51 3375,3635 v1(3430,3690)
PowEn2: ARDUINO_MINI_PRO.A3 P1.5 Rn2.1 | length 1605.1
  Top Layer w20: Rn2.1 2317.29,3170 2332.29,3155 v1(2335,3155) ; P1.5@3265,3310 3265,3304.43 3286.02,3283.41 ARDUINO_MINI_PRO.A3@3286.02,3010.28
  Bottom Layer w20: v1(2335,3155) 2480,3300 2645,3300 2760,3185 3150,3185 P1.5@3272.15,3307.15
PowEn3: ARDUINO_MINI_PRO.A7 P4.1 Rn8.1 | length 2370
  Top Layer w20: Rn8.1 2710,3800 2750,3800 v1(2765,3785) ; ARDUINO_MINI_PRO.A7@3984.76,2910 4410,2910 P4.1
  Bottom Layer w20: v1(2765,3785) 3190.47,3359.53 3290.51,3359.53 3319.53,3330.51 3319.53,3289.49 3298.31,3268.26 3298.31,3251.69 3445,3105 3964.24,3105 3988.8,3080.43 3990.69,3080.43 4025.47,3045.66 4025.47,3043.77 4034.37,3034.87 4034.37,2974.72 ARDUINO_MINI_PRO.A7@3986.96,2927.31
RL: ARDUINO_MINI_PRO.8 P2.2 Rrl1.1 | length 1454.3
  Top Layer w20: Rrl1.1@3675,1130 3678.09,1133.09 3778.09,1133.09 v1(3780,1135) ; P2.2@3820,2265 3825,2265 3876.57,2316.57 ARDUINO_MINI_PRO.8@3876.57,2419.72
  Bottom Layer w20: v1(3780,1135) 3741.85,1173.15 3741.85,1751.83 3815,1824.98 P2.2
RS485A1: Ptr2.4 Rptr3.2 Rptr14.2 Utr2.6 Utr4.2 | length 1382.9
  Top Layer w20: Utr4.2 995,650 1115,530 Rptr14.2 ; Rptr3.2 Rptr14.2 ; Utr2.6 1374.23,505.77 1309.23,505.77 1285,530 Rptr14.2
  Bottom Layer w20: Ptr2.4 480,650 Utr4.2
RS485A2: Ptr1.4 Rptr1.2 Rptr13.2 Utr1.6 Utr3.2 | length 1302.3
  Top Layer w20: Utr3.2 1025,1685 1070,1640 Rptr13.2 ; Rptr1.2 Rptr13.2 ; Utr1.6 1290,1620 1270,1640 Rptr13.2
  Bottom Layer w20: Ptr1.4 460,1685 Utr3.2
RS485B1: Ptr2.3 Rptr4.2 Rptr14.1 Utr2.7 Utr4.3 | length 1335.3
  Top Layer w20: Utr4.3 985,550 1095,440 Rptr14.1 ; Rptr4.2 1242.5,297.5 1242.5,437.5 Rptr14.1 ; Utr2.7 1310,455 1295,440 Rptr14.1
  Bottom Layer w20: Ptr2.3 380,550 Utr4.3
RS485B2: Ptr1.3 Rptr2.2 Rptr13.1 Utr1.7 Utr3.3 | length 1266.8
  Top Layer w20: Utr3.3 1090,1585 1125,1550 Rptr13.1 ; Rptr2.2 Rptr13.1 ; Utr1.7 1280,1570 1260,1550 Rptr13.1
  Bottom Layer w20: Ptr1.3 360,1585 Utr3.3
RST: ARDUINO_MINI_PRO.A1 P1.7 Pexlr.3 Pulr1.5 Ulr.4 | length 2816.1
  Top Layer w20: P1.7 3476.44,3303.56 3476.44,3013.56 ARDUINO_MINI_PRO.A1@3485,3005 ; v1(4260,3970) 4320.91,4030.91 4746.1,4030.91 4795.63,3981.38 Ulr.4 4795.63,3734.94 4825,3705.57 Pulr1.5@4825,3700
  Bottom Layer w20: P1.7@3480,3320 3925,3765 3925,4103.43 3943.28,4121.72 ; Pexlr.3@4055,4290 3990,4290 3955,4255 3955,4150 3943.28,4138.28 3943.28,4121.72 ; v1(4260,3970) 4258.09,3968.09 4227.58,3968.09 4224.5,3965 4100,3965 3943.28,4121.72
SCK: ARDUINO_MINI_PRO.13 P1.9 Pexlr.5 Pulr2.5 Ulr.12 | length 2585.3
  Top Layer w20: P1.9@3660,3315 3664.43,3315 3677.47,3328.04 3677.47,3332.47 3955,3610 3955,4085 Pexlr.5 ; P1.9 3670,3037.41 3687.41,3020 ARDUINO_MINI_PRO.13@3690,3020 ; v1(4233.08,4125) 4234.99,4126.91 4269.99,4126.91 4288.08,4145 4490.75,4145 4874.37,4528.62 Ulr.12 ; Ulr.12@4870,4585 4871.69,4585 4920,4633.31 Pulr2.5
  Bottom Layer w20: Pexlr.5@4062.24,4177.24 4072.76,4177.24 4109.53,4140.47 4179.57,4140.47 4193.13,4126.91 4231.16,4126.91 v1(4233.08,4125)
SCL: ARDUINO_MINI_PRO.A5 JPas.3 JPsc.3 P4.5 | length 3524.1
  Top Layer w20: ARDUINO_MINI_PRO.A5 3245.18,2895.89 3245.18,2864.82 3290,2820 3540,2820 3795,2565 4455,2565 P4.5@4465,2555 ; v1(4695,2720) 4955,2980 5230,2980 5345,3095 JPsc.3@5530,3095 ; JPsc.3@5540,3100 5780,3340 JPas.3
  Bottom Layer w20: P4.5@4460,2565 P4.5 4540,2565 v1(4695,2720)
SDA: ARDUINO_MINI_PRO.A4 JPas.4 JPsc.4 P4.4 | length 3462
  Top Layer w20: ARDUINO_MINI_PRO.A4@3345,2910 3560,2910 3870,2600 4400,2600 4447.78,2647.78 P4.4@4460,2660 ; P4.4@4475,2670 4480,2665 4715,2665 4990,2940 5270,2940 5325,2995 JPsc.4 ; JPsc.4@5550,2990 5548.01,2991.99 5548.01,3008.01 5880,3340 JPas.4
  Top Layer w27: P4.4@4445.28,2650.28 P4.4@4450,2655
swpo1: Cbst1.2 Dnb1.2 L1.1 Un1.6 | length 692.1
  Top Layer w20: Un1.6 2025,4034.41 2065,3994.41 L1.1@2065,3960 ; L1.1@2065,4025 2090,4025 2135,4070 Cbst1.2 ; Cbst1.2@2145,4210 2145,4222 2205,4282 Dnb1.2
TX: ARDUINO_MINI_PRO.9 JPtr.1 P2.1 Rtr1.2 | length 1860.4
  Top Layer w20: P2.1@3905,2265 3915,2265 3925,2265 3975,2315 ARDUINO_MINI_PRO.9@3975,2419.72 ; P2.1 3915,2110 3908.28,2103.28 3996.57,2015 4630,2015 4765,1880 5115.08,1880 5120,1875.08 JPtr.1@5120,1875 ; JPtr.1@5135,1875 Rtr1.2 Rtr1.2@5145,1675
U1EN: ARDUINO_MINI_PRO.3 P2.7 Rptr11.2 Rptr12.2 Utr2.2 Utr2.3 Utr4.6 Utr4.7 | length 3281.1
  Top Layer w20: Utr2.3 1596.85,505 1595,503.15 Utr2.2 1595.77,454.23 1645.77,454.23 1665,435 Rptr12.2 1960,435 2070,545 2180,545 Utr4.6 Utr4.7 ; P2.7@3315,2265 3325,2265 3384.45,2324.45 ARDUINO_MINI_PRO.3@3384.45,2419.72
  Bottom Layer w20: Utr4.6 2185,552.43 3460,1827.43 3460,2110 P2.7
U1RX: ARDUINO_MINI_PRO.4 P2.6 Rptr9.2 Utr2.1 Utr4.5 | length 3344.9
  Top Layer w20: Utr2.1 1643.28,405 1655,393.28 1655,306.72 1666.72,295 1710,295 Rptr9.2 2020,285 Utr4.5 ; P2.6@3410,2260 3420,2260 3482.87,2322.87 ARDUINO_MINI_PRO.4@3482.87,2419.72
  Bottom Layer w20: Utr4.5 2191.85,456.85 2191.85,488.17 2203.57,499.88 2205.76,499.88 2235.12,529.24 2235.12,560.12 3505,1830 3505,2165 P2.6
U1TX: ARDUINO_MINI_PRO.2 P2.8 Rptr10.2 Utr2.4 Utr4.8 | length 3105.4
  Top Layer w20: Utr2.4 1638.28,555 1650,566.72 1650,640 1675,665 Rptr10.2 1787.29,665 1802.29,650 v1(1805,650) ; P2.8@3220,2270 3222.24,2267.76 3227.76,2267.76 3286.02,2326.02 ARDUINO_MINI_PRO.2@3286.02,2419.72
  Bottom Layer w20: v1(1805,650) 2085,650 Utr4.8 2340.15,750 3422.57,1832.43 3422.57,2047.43 P2.8
U2ENo: ARDUINO_MINI_PRO.A6 P4.2 Rptr7.2 Rptr8.2 Utr1.2 Utr1.3 Utr3.6 Utr3.7 | length 4106.3
  Top Layer w20: Utr1.3 Utr1.2 1640,1570 1649.97,1560.03 1660,1550 Rptr8.2 Rptr7.2 2125.92,1550 2160.92,1585 Utr3.6 Utr3.7 ; ARDUINO_MINI_PRO.A6@3984.76,2811.57 4411.57,2811.57 4460,2860 P4.2@4470,2860
  Bottom Layer w20: Utr3.7 2665,2178.19 2665,2315 3980,2315 4055,2390 4055,2455.5 3833.79,2676.72 3833.79,2693.28 3888.98,2748.48 3911.9,2748.48 ARDUINO_MINI_PRO.A6
U2RXo: ARDUINO_MINI_PRO.RX JPsc4.3 P2.11 Rptr5.2 Utr1.1 Utr3.5 | length 2965.9
  Top Layer w20: Utr1.1 1628.28,1520 1640,1508.28 1640,1425 1665,1400 Rptr5.2 2086.81,1400 Utr3.5 2275,1588.19 2275,2385 2305,2415 JPsc4.3 ; ARDUINO_MINI_PRO.RX@2785,2676.57 2970.61,2490.96 2970.61,2454.39 ARDUINO_MINI_PRO.RX@2985,2440 ; P2.11@2910,2265 2925,2265 2981.85,2321.85 ARDUINO_MINI_PRO.RX@2981.85,2430.51
  Bottom Layer w20: JPsc4.3 2655,2415 2720,2350 2912.89,2350 ARDUINO_MINI_PRO.RX@2981.44,2418.56
U2TXo: ARDUINO_MINI_PRO.TX JPsc4.2 P2.12 Rptr6.2 Utr1.4 Utr3.8 | length 2460.6
  Top Layer w20: Utr1.4 1580.77,1670.77 1638.28,1670.77 1650,1682.48 1650,1760 1670,1780 Rptr6.2 1744.02,1780 v1(1794.36,1729.67) ; Utr3.8 2171.81,2466.81 2220,2515 JPsc4.2 JPsc4.2@2402.5,2515 ; ARDUINO_MINI_PRO.TX@2777.36,2567.36 ARDUINO_MINI_PRO.TX@2780,2570 ; ARDUINO_MINI_PRO.TX@2785,2578.15 2872.19,2490.96 2872.19,2442.81 ARDUINO_MINI_PRO.TX@2885,2430 ; P2.12@2820,2260 2815,2265 2815,2362.09 2872.64,2419.72 ARDUINO_MINI_PRO.TX@2883.43,2419.72
  Bottom Layer w20: v1(1794.36,1729.67) 2116.48,1729.67 Utr3.8 ; JPsc4.2 2721.85,2515 2770,2563.15 ARDUINO_MINI_PRO.TX@2770,2585
V+: DN3.1 Jn1.2 Jn.1 | length 1084
  Top Layer w40: DN3.1@490,4105 570,4185 Jn.1 ; Jn.1@560,4400 835,4400 1091.61,4656.61 1091.61,4756.61 Jn1.2
VCC: ARDUINO_MINI_PRO.VCC C1.1 Cn1.2 Cn7.1 Cn8.1 L1.2 R6.1 Rn9.2 Tn7.2 | length 3276.2
  Top Layer w20: Cn7.1 2235,3690 2255,3670 Cn8.1 2255,3647.5 2275,3627.5 2287.5,3627.5 2360,3555 2482,3555 2485,3552 Tn7.2@2485,3550 ; Cn8.1@2260,3675 2260,3677.5 2347.5,3765 Rn9.2 ; L1.2 2350,3925 2350,3817 2392,3775 Rn9.2@2400,3775 ; L1.2@2295,4020 2300,4020 2445,4165 C1.1 R6.1 R6.1@2730,4430 ; v1(2455,3005) 2455,3148 2525,3218 Cn1.2 ; Tn7.2 2490,3257 2520,3227 Cn1.2@2520,3225 ; ARDUINO_MINI_PRO.VCC@2791.02,2759.49 2938.66,2759.49 ARDUINO_MINI_PRO.VCC@3184.72,3005.55
  Bottom Layer w20: v1(2455,3005) 2700.51,2759.49 ARDUINO_MINI_PRO.VCC@2791.02,2759.49
VCC5: Ca1.1 Ca2.1 Ca3.1 Ca4.1 Ca5.1 Ca7.1 Ca8.1 Ca9.1 Cha1.1 Cn2.1 Drl1.2 H1.2 H2.1 JPas.1 JPrev.2 JPsc4.1 JPsc.2 JPtr.2 Jre.3 RL1.5 Rptr1.1 Rptr3.1 Rptr5.1 Rptr6.1 Rptr7.1 Rptr8.1 Rptr9.1 Rptr10.1 Rptr11.1 Rptr12.1 Rre.2 Rrev.2 Rrl2.2 Rrl3.2 Tn7.3 Utr1.8 Utr2.8 Utr3.4 Utr4.4 VR1.1 | length 19771.1
  Top Layer w20: Rptr1.1 1400,1865 1430,1835 ; v1(1305,365) 1336.82,396.82 1337.74,396.82 1345.92,405 Utr2.8 1435,405 1447.77,392.23 ; Rptr8.1 Rptr7.1 1840,1743 1715,1868 Rptr6.1 1465,1870 1430,1835 ; Rptr9.1 1715,190 1470,190 1447.77,212.23 Cn2.1 1447.77,392.23 ; Rptr12.1 Rptr11.1 1845,710 1800,755 Rptr10.1 1490,755 1455,720 ; Ca8.1@2323.89,1131.11 Ca8.1@2325,1130 ; JPsc4.1 2490,2525 2490,2213.61 ; JPsc4.1@2405,2620 2570,2785 2570,3255.28 2530,3295.28 Tn7.3 2620,3455 2805,3640 2805,3939.17 2925.83,4060 2973.07,4060 3007.77,4094.7 Cha1.1 ; 2488.63,2211.37 2610,2090 H2.1@2610,1820 ; H2.1@2588.5,1793.5 2600.35,1805.35 H2.1@2600.35,1819.65 ; H2.1 2610,1399 2354.62,1143.62 2333.62,1143.62 Ca8.1 ; Ca9.1 3492.23,1107.23 3675,1290 4075,1290 4084.15,1280.85 4087.31,1280.85 4105,1263.16 Ca3.1@4105,1260 ; Ca9.1@3430,1100 3430,1103.16 3403.16,1130 Ca8.1@2325,1130 ; H1.2@4260,1765 4259.04,1765.96 4240.96,1765.96 4104.87,1629.87 Ca3.1 4514.77,1267.23 4515,1267 Rrl3.2@4515,1250 ; Rrl3.2 4837.72,1250 Drl1.2@5005,1082.72 ; Drl1.2 5000,1052.28 5290.87,761.42 5290.87,724.13 RL1.5@5310,705 ; Drl1.2@5015,1075 5160,1075 v1(5205,1120) ; JPrev.2 5220,2765 v1(5270,2715) 5795,2715 5890,2810 6034.13,2810 6035,2809.13 Jre.3@6035,2795 ; JPtr.2 5383,1980 5413,2010 Rre.2@5425,2010 ; v1(5260,2585) 5260,2582.29 5284.87,2557.43 5284.87,2489.87 Ca4.1@5275,2480 ; v1(5275,3095) 5290.13,3110.13 Ca5.1@5290.13,3200 ; Ca4.1 5384.77,2482.23 5495,2372 Rrev.2@5495,2360 ; RL1.5@5296.26,701.22 RL1.5@5313.54,701.22 ; Rre.2 5427,2020 5442,2005 5442,2003 5510,1935 Ca2.1@5510,1770.13 ; Rre.2@5425,2025 5432,2025 5490,2083 Rrev.2@5490,2360 ; Ca7.1 5475.93,3642.23 5447.17,3613.47 5446.45,3613.47 5190,3357.02 5190,3211.72 5201.72,3200 Ca5.1@5290.13,3200 ; Ca7.1@5490,3635 5479.87,3645.13 5479.87,3739.87 JPas.1 ; JPsc.2@5535,3190 5529.22,3190 5511.45,3207.77 Ca5.1 Ca5.1@5290.13,3200 ; 1429.8,1511.26 1437.77,1503.28 Ca1.1 1437.77,1327.23 1455,1310 Rptr5.1 1715,1308 1730,1293 1732,1293 1895,1130 Ca8.1 ; 1429.8,1511.26 1421.82,1519.23 1291.94,1519.23 1287.71,1515 v1(1285,1515) 1285,915 1240,870 Rptr3.1 1410,765 1455,720 ; 1429.8,1511.26 1430,1511.46 1430,1835 ; 1447.77,392.23 1455,399.46 1455,720 ; Ca8.1 Ca8.1@2325,1130
  Bottom Layer w20: Utr3.4 1252.29,1485 1282.29,1515 v1(1285,1515) ; Utr4.4 567.19,450 607.19,410 1080,410 1125,365 v1(1305,365) ; JPtr.2 5215,1900 5215,1130 v1(5205,1120) ; v1(5260,2585) 5270,2595 v1(5270,2715) ; v1@5265,2710 v1(5270,2715) ; v1(5275,3095) 5275,2720 v1(5270,2715)
VCCpl: Ca6.1 Pexlr.2 Pulr1.6 Tn4.3 Ulr.3 | length 2613.6
  Top Layer w20: Tn4.3 3735,4390 3865,4520 4110,4520 4119.97,4510.03 4160,4470 4160,4400 Pexlr.2@4165,4395 ; Pexlr.2 4154.57,4384.57 4154.57,4351.24 4142.86,4339.53 4139.48,4339.53 4110.47,4310.52 4110.47,4269.48 4120,4259.96 4120,4220.04 4110.47,4210.52 4110.47,4169.48 4120,4159.96 4120,4120.04 4110.47,4110.52 4110.47,3734.53 4450,3395 4525,3395 Ca6.1@4610,3480 ; Ca6.1@4605,3500 4605,3506.84 4720,3621.84 Pulr1.6 ; Ulr.3 4716.89,3718.04 Pulr1.6@4724.93,3710
VCCpll: Cha2.1 Rn3.2 Tn4.2 VR1.3 | length 1477.4
  Top Layer w20: VR1.3 2973.62,3879.45 2982.32,3870.75 2982.32,3804.25 3065,3721.57 Cha2.1@3065,3710 ; Cha2.1@3070,3715 Cha2.1@3065,3710 ; Tn4.2 3775,3938 3848,3865 Rn3.2@3860,3865 ; Rn3.2 3858,3855 3643,3640 3076.72,3640 3065,3651.72 Cha2.1@3065,3710
Vsen1: Cn3.1 Dn1.1 Dn2.1 Tn2.2 | length 3220.4
  Top Layer w20: Cn3.1 Tn2.2
  Top Layer w40: Cn3.1 684.96,2029.96 640,1985 458.43,1985 435,1961.57 435,1275 ; Dn2.1@699.26,260 458.43,260 435,283.43 435,1275 ; Dn1.1@705,1275 435,1275
pads on no net: ARDUINO_MINI_PRO.DTR H2.5 H2.6 J1. J2. J3. J4. J5. J6. J7. J8.3 Jn1.3 Jn.3 P1.2 P1.3 Pulr1.1 Pulr1.2 Pulr1.3 Pulr2.6 Pulr2.7 Ulr.6 Ulr.7 Ulr.8 Ulr.10 Ulr.11

## Polygon pours and split planes (outlines as drawn)
GND on Top Layer "GND_L01_P000" (solid, pour order 0): 8.64,4939 13.64,4934 13.64,34 6338.64,34 6348.64,24 6348.64,4934
GND on Bottom Layer "GND_L02_P001" (solid, pour order 1): 39.61,4937.24 39.61,47.24 79.61,7.24 6399.61,7.24 6399.61,4927.24 6384.61,4942.24

## Keep-outs
Keep-Out Layer:
  lines w39.37: 275,4905 6330,4905 6330,0 0,0 0,4910 275,4910

## Text inside footprints (layer, text, board x,y; h text height)
Pexlr: Top Overlay "2" at 4140,4490 h50 r270; Top Overlay "1" at 4040,4470 h50 r270; Top Overlay "7" at 4040,4030 h50 r270; Top Overlay "8" at 4140,4030 h50 r270